# Altium PCB BBiQ_PCB.PcbDoc (part 1 of 2)
Units mil, origin at the board's own origin, x right, y up, seen from the top; angles counter-clockwise.
Board outline 2950 x 4745 mil, 2 copper layers (Top Layer, Bottom Layer); 173 components, 113 nets, 521 pads, 256 vias.
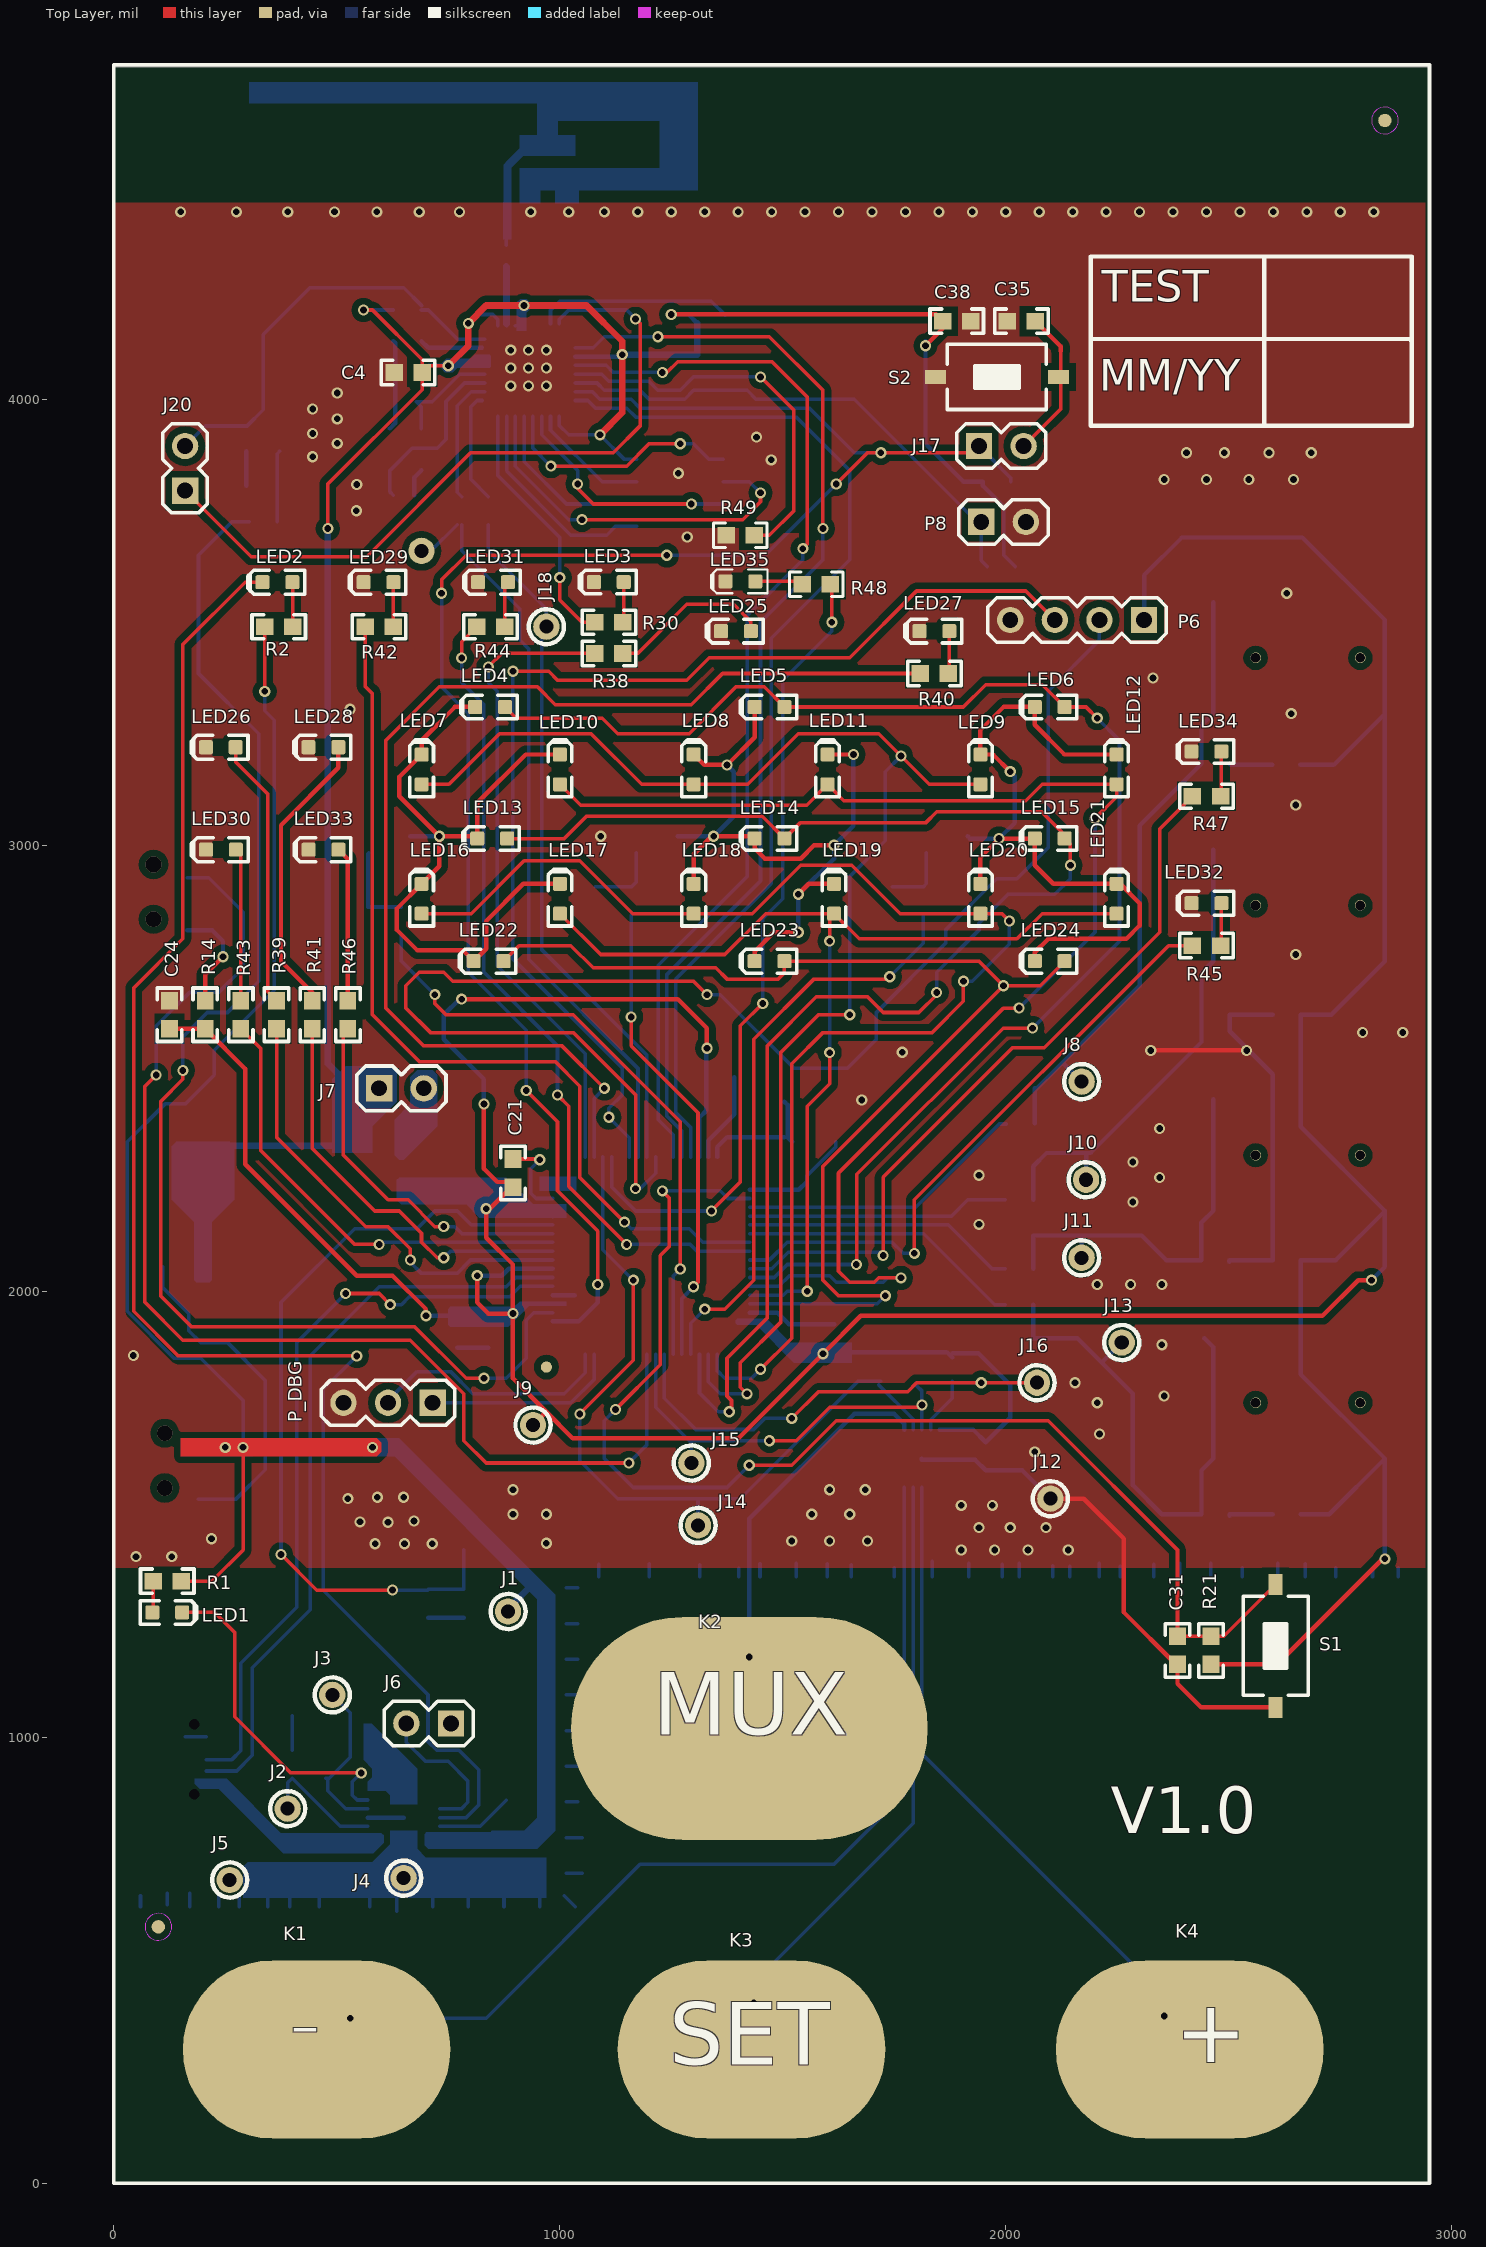
[diagram p0: Top Layer view]
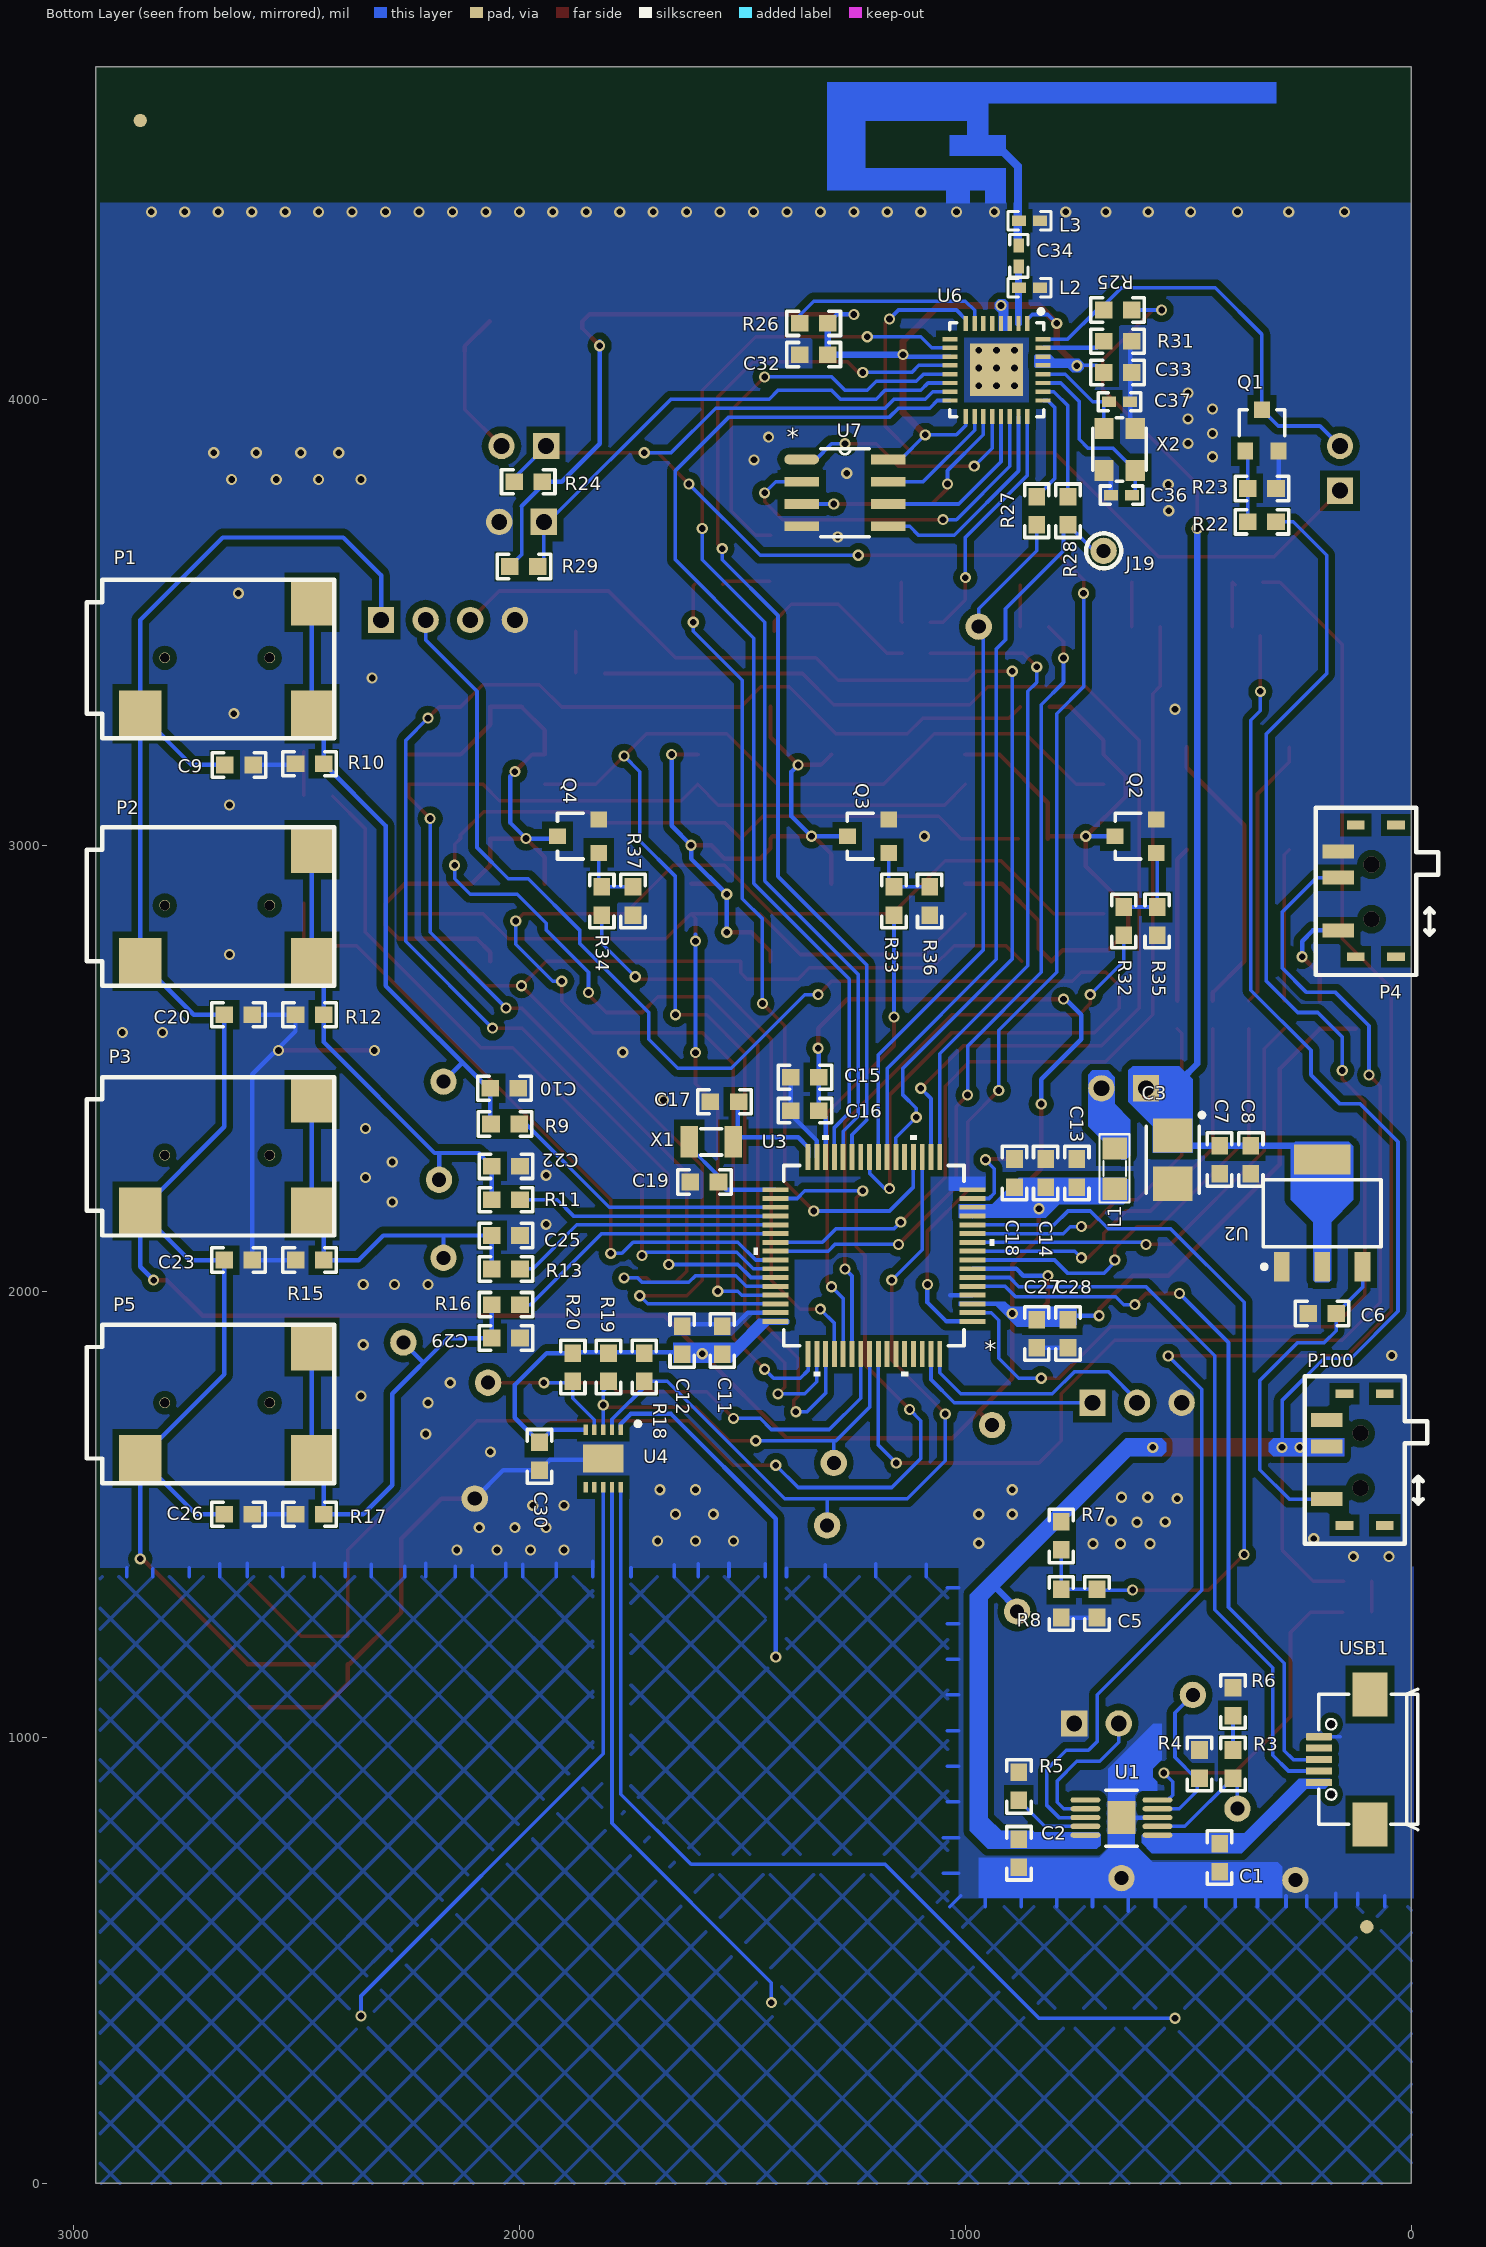
[diagram p1: Bottom Layer view, seen from below]
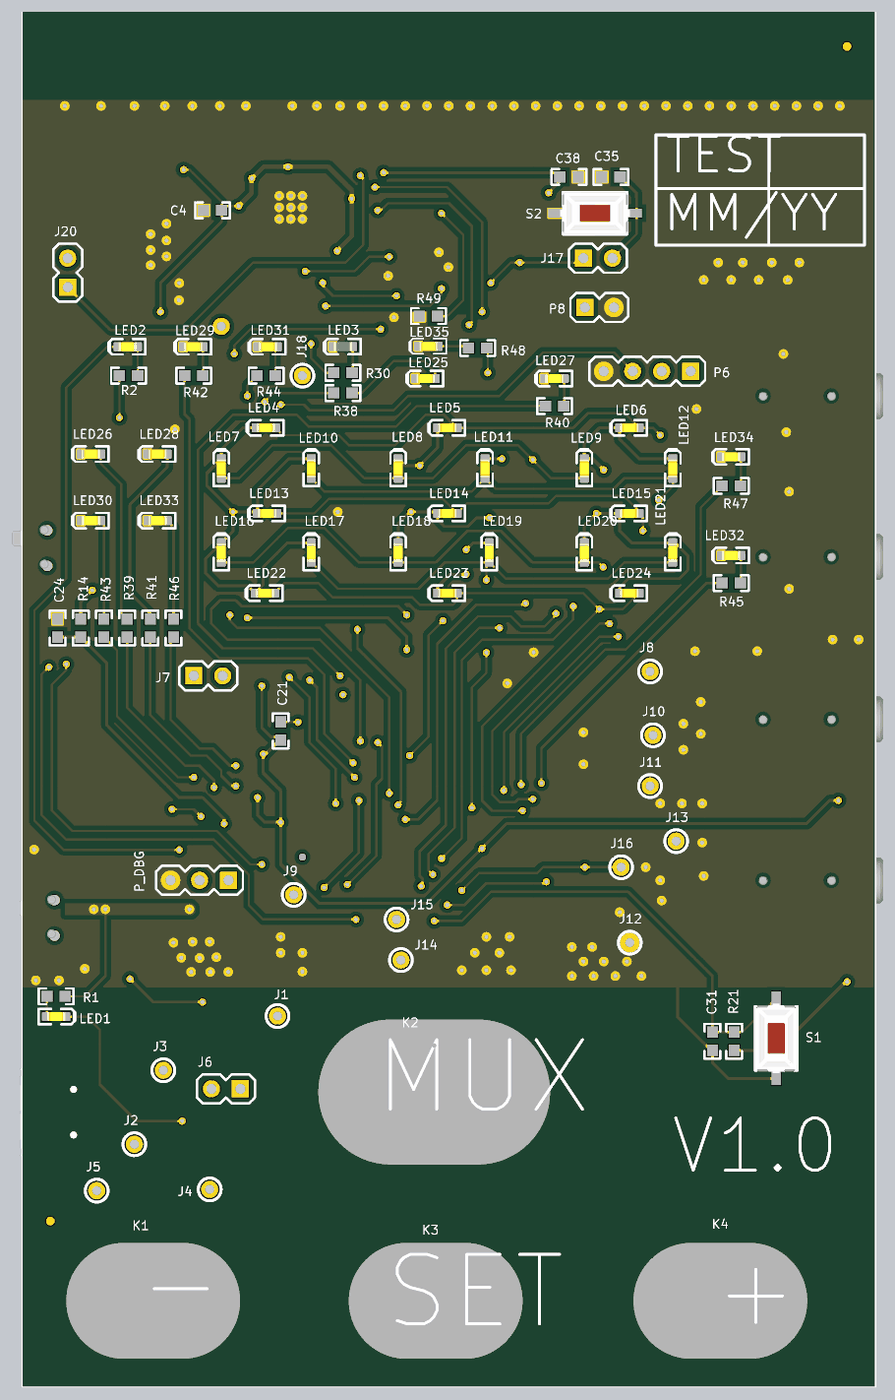
[diagram p3: 3D render of the assembled board from above, using the file's embedded part models]

## Layer stack, top to bottom
Top Solder: solder mask 0.4, Solder Resist, Dk 3.5
Top Layer: signal copper 1.4
Dielectric 1: dielectric 12.6, FR-4, Dk 4.8
Bottom Layer: signal copper 1.4
Bottom Solder: solder mask 0.4, Solder Resist, Dk 3.5

## Board outline
0,0 2950,0 2950,170 2950,4745 2640,4745 0,4745 0,4485 0,0

## Design rules (kind name [scope] priority, off if disabled: settings)
Clearance [All] p1: gap=15
DiffPairsRouting [All] p1: maxlimit=10 minlimit=10 mostfreqgap=10 toplayer_minwidth=8 toplayer_maxwidth=15 toplayer_prefwidth=10 bottomlayer_minwidth=8 bottomlayer_maxwidth=15 bottomlayer_prefwidth=10 maxuncoupledlength=500
PolygonConnect PolygonConnect_Via [InNet('GND')] p1: connectstyle=Direct reliefconductorwidth=10 reliefentries=4 polygonreliefangle="90 Angle" airgapwidth=10
PolygonConnect [All] p2: connectstyle=Relief reliefconductorwidth=10 reliefentries=4 polygonreliefangle="90 Angle" airgapwidth=10
RoutingVias [All] p1: holewidth=15 width=15 viastyle="Through Hole" minholewidth=15 minwidth=25 maxholewidth=20 maxwidth=50
SolderMaskExpansion [All] p1: expansion=4
Width [All] p1: maxlimit=20 minlimit=8 preferedwidth=8 minimp=50.000000 maximp=50.000000 favimp=50.000000
Width Width_3v3 [(InNet('V_ESP') AND InNet('V_KL27'))] p2: maxlimit=15 minlimit=15 preferedwidth=15 minimp=50.000000 maximp=50.000000 favimp=50.000000
29 further rules are at their usual default settings.

## Classes and differential pairs
differential pair USB_D: +USB_D_P -USB_D_N

## Components (designator, comment, footprint, x,y, rotation, side; value= is the part's Value field where it differs from the comment)
C1 "1uF" 0603 430,730 r270 bottom
C2 "2.2uF" 0603 880,740 r270 bottom
C3 "293D107X96R3B2TE3" 3528-21 535,2295 r270 bottom
C4 "103" 0603 660,4060 r180 top
C5 "0603YC104JAT2A" 0603 705,1300 r270 bottom
C6 "103" 0603 200,1950 r0 bottom
C7 "103" 0603 430,2295 r270 bottom
C8 "103" 0603 360,2295 r270 bottom
C9 "0603YC104JAT2A" 0603 2628.5,3180 r180 bottom
C10 "0603YC104JAT2A" 0603 2033.5,2455 r180 bottom
C11 "0603YC104JAT2A" 0603 1545,1890 r90 bottom
C12 "0603YC104JAT2A" 0603 1635,1890 r90 bottom
C13 "0603YC104JAT2A" 0603 750,2265 r90 bottom
C14 "0603YC104JAT2A" 0603 820,2265 r90 bottom
C15 "0603YC104JAT2A" 0603 1360,2480 r0 bottom
C16 "0603YC104JAT2A" 0603 1360,2405 r0 bottom
C17 "0603YC104JAT2A" 0603 1540,2425 r0 bottom
C18 "0603YC104JAT2A" 0603 890,2265 r90 bottom
C19 "0603YC104JAT2A" 0603 1585,2245 r0 bottom
C20 "0603YC104JAT2A" 0603 2630,2620 r180 bottom
C21 "0603YC104JAT2A" 0603 895,2265 r90 top
C22 "0603YC104JAT2A" 0603 2030,2280 r180 bottom
C23 "0603YC104JAT2A" 0603 2630,2070 r180 bottom
C24 "0603YC104JAT2A" 0603 125,2620 r90 top
C25 "0603YC104JAT2A" 0603 2030,2125 r180 bottom
C26 "0603YC104JAT2A" 0603 2630,1500 r180 bottom
C27 "0603YC104JAT2A" 0603 840,1905 r270 bottom
C28 "0603YC104JAT2A" 0603 770,1905 r270 bottom
C29 "0603YC104JAT2A" 0603 2030,1895 r180 bottom
C30 "0603YC104JAT2A" 0603 1955,1630 r270 bottom
C31 "0.1uF" 0603 2385,1195 r270 top
C32 "10uF" 0603 1340,4100 r0 bottom
C33 "0.1uF" 0603 658.5,4060 r180 bottom
C34 "5.6p" 0402 880,4321.38 r90 bottom
C35 "0.1uF" 0603 2035,4175 r180 top
C36 "10pF" 0402 650,3785 r0 bottom
C37 "10pF" 0402 654.37,3994.37 r180 bottom
C38 "0.1uF" 0603 1890,4175 r0 top
J1 "TP" TP 884,1282 r270 top
J2 "TP" TP 390,840 r180 top
J3 "TP" TP 490,1095 r180 top
J4 "TP" TP 650,684.21 r270 top
J5 "TP" TP 260,680 r180 top
J6 "I_SET2" HDR1X2 756,1031 r180 top
J7 "Power Selection" HDR1X2 595,2455 r0 top
J8 "TP" TP 2170,2470 r0 top
J9 "TP" TP 940,1700 r0 top
J10 "TP" TP 2180,2250 r0 top
J11 "TP" TP 2170,2075 r0 top
J12 "TP" TP 2100,1535 r0 top
J13 "TP" TP 2260,1885 r0 top
J14 "TP" TP 1310,1475 r0 top
J15 "TP" TP 1295,1615 r0 top
J16 "TP" TP 2070,1795 r0 top
J17 "Manual Boot" HDR1X2 1940,3895 r0 top
J18 "TP" TP 970,3490 r0 top
J19 "TP" TP 690,3660 r180 bottom
J20 "DeepSleep" HDR1X2 160,3795 r90 top
K1 "Single_Key" PAD_FINGETIP#1 455,300 r0 top
K2 "Single_Key" PAD_FINGETIP#2 1425,1020 r0 top
K3 "Single_Key" PAD_FINGETIP#1 1430,300 r0 top
K4 "Single_Key" PAD_FINGETIP#1 2412.54,300 r0 top
L1 "100nH 330Ohm 100MHz" 0805 665,2275 r270 bottom
L2 "CRCW08051K00JNEA" 0402 856.38,4250 r0 bottom
L3 "CRCW08051K00JNEA" 0402 856.38,4400 r0 bottom
LED1 "LED" LED-0603-YELLOW 120,1280 r0 top
LED2 "LED" LED-0603-YELLOW 366.85,3589.69 r180 top
LED3 "Green" LED0603 1110,3590 r180 top
LED4 "LED" LED-0603-YELLOW 843.78,3310 r180 top
LED5 "LED" LED-0603-YELLOW 1470.32,3310 r180 top
LED6 "LED" LED-0603-YELLOW 2098.46,3310 r180 top
LED7 "LED" LED-0603-YELLOW 690.32,3170 r90 top
LED8 "LED" LED-0603-YELLOW 1300.32,3170 r90 top
LED9 "LED" LED-0603-YELLOW 1943.15,3170 r90 top
LED10 "LED" LED-0603-YELLOW 1000.32,3170 r90 top
LED11 "LED" LED-0603-YELLOW 1600.32,3170 r90 top
LED12 "LED" LED-0603-YELLOW 2248.46,3170 r90 top
LED13 "LED" LED-0603-YELLOW 848.46,3015 r180 top
LED14 "LED" LED-0603-YELLOW 1470.32,3015 r180 top
LED15 "LED" LED-0603-YELLOW 2098.46,3015 r180 top
LED16 "LED" LED-0603-YELLOW 690.32,2880 r90 top
LED17 "LED" LED-0603-YELLOW 1000.32,2880 r90 top
LED18 "LED" LED-0603-YELLOW 1300.32,2880 r90 top
LED19 "LED" LED-0603-YELLOW 1615,2880 r90 top
LED20 "LED" LED-0603-YELLOW 1943.15,2880 r90 top
LED21 "LED" LED-0603-YELLOW 2248.46,2880 r90 top
LED22 "LED" LED-0603-YELLOW 840.32,2740 r180 top
LED23 "LED" LED-0603-YELLOW 1470.32,2740 r180 top
LED24 "LED" LED-0603-YELLOW 2098.46,2740 r180 top
LED25 "LED" LED-0603-YELLOW 1395,3480 r180 top
LED26 "LED" LED-0603-YELLOW 240,3219.69 r180 top
LED27 "LED" LED-0603-YELLOW 1840,3480 r180 top
LED28 "LED" LED-0603-YELLOW 470,3219.69 r180 top
LED29 "LED" LED-0603-YELLOW 593.78,3589.69 r180 top
LED30 "LED" LED-0603-YELLOW 240.32,2990 r180 top
LED31 "LED" LED-0603-YELLOW 850.32,3589.69 r180 top
LED32 "LED" LED-0603-YELLOW 2450,2870 r180 top
LED33 "LED" LED-0603-YELLOW 470.32,2990 r180 top
LED34 "LED" LED-0603-YELLOW 2450,3210 r180 top
LED35 "LED" LED-0603-YELLOW 1405,3591.5 r180 top
P1 "Header 3" JACK_MONO 2795,3420 r180 bottom
P2 "Header 3" JACK_MONO 2795,2865 r180 bottom
P3 "Header 3" JACK_MONO 2795,2305 r180 bottom
P4 "Header 3" SW_SLIDE 164.37,2809.06 r90 bottom
P5 "Header 3" JACK_MONO 2795,1750 r180 bottom
P6 "Header 4" HDR1X4 2310,3505 r180 top
P8 "Header 2X1" HDR1X2 1945,3725 r0 top
P100 "Header 3" SW_SLIDE 189.37,1534.06 r90 bottom
P_DBG "Header 3" HDR1X3 715,1750 r180 top
Q1 "MMBT2222A" SOT23A 335,3930 r180 bottom
Q2 "MMBT2222A" SOT23A 618.15,3020.31 r90 bottom
Q3 "MMBT2222A" SOT23A 1218.15,3020.31 r90 bottom
Q4 "MMBT2222A" SOT23A 1868.15,3020.31 r90 bottom
R1 "1.5k" 0603 120,1350 r0 top
R2 "1.5k" 0603 370,3490 r180 top
R3 "220" 0603 400,940 r270 bottom
R4 "10k" 0603 475,940 r270 bottom
R5 "10k" 0603 880,890 r270 bottom
R6 "330" 0603 400,1080 r270 bottom
R7 "10k" 0603 785,1451.5 r90 bottom
R8 "10k" 0603 785,1300 r90 bottom
R9 "CRCW06031K00FKEA" 0603 2032.01,2375 r180 bottom
R10 "CRCW06031K00FKEA" 0603 2470.33,3182.73 r180 bottom
R11 "CRCW06031K00FKEA" 0603 2030,2205 r180 bottom
R12 "CRCW06031K00FKEA" 0603 2470.33,2620 r180 bottom
R13 "CRCW06031K00FKEA" 0603 2030,2050 r180 bottom
R14 "CRCW08051K00JNEA" 0603 205,2620 r90 top
R15 "CRCW06031K00FKEA" 0603 2470,2070 r180 bottom
R16 "CRCW06031K00FKEA" 0603 2030,1970 r180 bottom
R17 "CRCW06031K00FKEA" 0603 2470.33,1500 r180 bottom
R18 "CRCW08051K00JNEA" 0603 1720,1830 r270 bottom
R19 "CRCW08051K00JNEA" 0603 1800,1830 r270 bottom
R20 "CRCW08051K00JNEA" 0603 1880,1830 r270 bottom
R21 "CRCW08051K00JNEA" 0603 2460,1195 r90 top
R22 "CRCW08051K00JNEA" 0603 335,3725 r0 bottom
R23 "CRCW08051K00JNEA" 0603 335,3800 r0 bottom
R24 "CRCW08051K00JNEA" 0603 1980,3815 r180 bottom
R25 "CRCW08051K00JNEA" 0603 658.5,4200 r180 bottom
R26 "CRCW08051K00JNEA" 0603 1340,4170 r180 bottom
R27 "CRCW08051K00JNEA" 0603 840,3750 r90 bottom
R28 "CRCW08051K00JNEA" 0603 770,3750 r90 bottom
R29 "CRCW08051K00JNEA" 0603 1990,3625 r0 bottom
R30 "CRCW08051K00JNEA" 0603 1110,3500 r180 top
R31 "CRCW08051K00JNEA" 0603 658.5,4130 r0 bottom
R32 "CRCW06031K00FKEA" 0603 645,2830 r90 bottom
R33 "CRCW06031K00FKEA" 0603 1160,2875 r90 bottom
R34 "CRCW06031K00FKEA" 0603 1815,2875 r90 bottom
R35 "CRCW06031K00FKEA" 0603 570,2830 r90 bottom
R36 "CRCW06031K00FKEA" 0603 1080,2875 r90 bottom
R37 "CRCW06031K00FKEA" 0603 1745,2875 r90 bottom
R38 "CRCW06031K00FKEA" 0603 1110,3430 r180 top
R39 "CRCW06031K00FKEA" 0603 365,2620 r270 top
R40 "CRCW06031K00FKEA" 0603 1840,3385 r180 top
R41 "CRCW06031K00FKEA" 0603 445,2620 r270 top
R42 "CRCW06031K00FKEA" 0603 595,3490 r180 top
R43 "CRCW06031K00FKEA" 0603 285,2620 r270 top
R44 "CRCW06031K00FKEA" 0603 845,3490 r180 top
R45 "CRCW06031K00FKEA" 0603 2450,2775 r180 top
R46 "CRCW06031K00FKEA" 0603 525,2620 r270 top
R47 "CRCW06031K00FKEA" 0603 2450,3110 r180 top
R48 "CRCW06031K00FKEA" 0603 1575,3585 r0 top
R49 "CRCW06031K00FKEA" 0603 1405,3695 r180 top
S1 "SW-SMD" SW-SMD 2605,1205 r270 top
S2 "SW-SMD" SW-SMD 1980,4050 r180 top
U1 "BQ24090DGQR" DGQ0010D_NV_N 650,820 r0 bottom
U2 "NCP1117" SOT-223B_L 200,2175 r90 bottom
U3 "MKL27Z64VLH4" 98ASS23234W 1205,2080 r0 bottom
U4 "CAP1106" TDFN33-10PIN 1812.01,1625 r270 bottom
U6 "ESP8266EX" QFN32_ESP8266 930,4065.94 r270 bottom
U7 "W25Q80DV" SOIC8_208MIL 1270,3790 r180 bottom
USB1 "USB_M" USB_MICRO_SMD 150,950 r90 bottom
X1 "32.768KHZ" XTAL_3215 1570,2335 r180 bottom
X2 "26MHz" BT-XTAL_3225 654.31,3887.36 r270 bottom

## Footprints (in the part's own frame and the unit in brackets; to place one, negate y for a bottom-side part, rotate by r counter-clockwise, add the part's x,y. Pads: shape width x height; smd on the part's side, far side on the other; paste and mask are expansions set on the pad)
98ASS23234W [mil]
  rect 58x11 smd: 1(-221,147.64) 2(-221,127.95) 3(-221,108.27) 4(-221,88.58) 5(-221,68.9) 6(-221,49.21) 7(-221,29.53) 8(-221,9.84) 9(-221,-9.84) 10(-221,-29.53) 11(-221,-49.21) 12(-221,-68.9) 13(-221,-88.58) 14(-221,-108.27) 15(-221,-127.95) 16(-221,-147.64) 33(221,-147.64) 34(221,-127.95) 35(221,-108.27) 36(221,-88.58) 37(221,-68.9) 38(221,-49.21) 39(221,-29.53) 40(221,-9.84) 41(221,9.84) 42(221,29.53) 43(221,49.21) 44(221,68.9) 45(221,88.58) 46(221,108.27) 47(221,127.95) 48(221,147.64)
  rect 11x58 smd: 17(-147.64,-221) 18(-127.95,-221) 19(-108.27,-221) 20(-88.58,-221) 21(-68.9,-221) 22(-49.21,-221) 23(-29.53,-221) 24(-9.84,-221) 25(9.84,-221) 26(29.53,-221) 27(49.21,-221) 28(68.9,-221) 29(88.58,-221) 30(108.27,-221) 31(127.95,-221) 32(147.64,-221) 49(147.64,221) 50(127.95,221) 51(108.27,221) 52(88.58,221) 53(68.9,221) 54(49.21,221) 55(29.53,221) 56(9.84,221) 57(-9.84,221) 58(-29.53,221) 59(-49.21,221) 60(-68.9,221) 61(-88.58,221) 62(-108.27,221) 63(-127.95,221) 64(-147.64,221)
  silkscreen extent -270,-270 270,270
0402 [mm] "0402 from SM-752 data"
  rect 0.8x0.6 smd: 1(-0.6,0) 2(0.6,0)
  silkscreen extent -1.22,-0.52 1.22,0.52, body extent -0.55,-0.3 0.55,0.3, height 0.6
0603 [mm] "0603 from SM-752 data"
  rect 1x0.95 smd: 1(-0.8,0) 2(0.8,0)
  silkscreen extent -1.52,-0.69 1.52,0.69, body extent -0.87,-0.47 0.87,0.47, height 0.85
0805 [mil] "Compoment SMD 80x50mil"
  rect 50x55 smd: 1(-45,0) 2(45,0)
  silkscreen extent -77,-34 76,33, body extent -40,-27 40,23, height 24
3528-21 [mm] "Medium Density IPC, based on SM-782 section 8.4"
  rect 1.95x2.25 smd: 1(-1.375,0) 2(1.375,0)
  silkscreen extent -2.66,-1.5 1.9,1.79, body extent -1.85,-1.5 1.85,1.5, height 2.1
BT-XTAL_3225 [mm]
  rect 1.2x1.1 smd: 1(-1.194,-0.89) 2(1.194,-0.89) 3(1.194,0.891) 4(-1.194,0.891)
  silkscreen extent -1.8,-1.52 1.8,1.52, body extent -1.6,-1.25 1.61,1.25, height 0.81
DGQ0010D_NV_N [mm]
  oval 1.7x0.3 smd paste+0 mask+0.051: 1(-2.05,1) 2(-2.05,0.5) 3(-2.05,0) 4(-2.05,-0.5) 5(-2.05,-1) 6(2.05,-1) 7(2.05,-0.5) 8(2.05,0) 9(2.05,0.5) 10(2.05,1)
  rect 1.57x1.88 smd paste+0 mask+0.051: 11(0,0)
  silkscreen extent -0.9,-1.55 0.9,1.63
HDR1X2 [mm] "Connector; Header; 2 Position"
  rect 1.5x1.5 hole 0.9: 1(0,0)
  round 1.5 hole 0.9: 2(2.54,0)
  silkscreen extent -1.27,-1.27 3.81,1.27, body extent -1.27,-1.27 3.81,1.27, height 7
HDR1X3 [mm] "Connector; Header; 3 Position"
  rect 1.5x1.5 hole 0.9: 1(0,0)
  round 1.5 hole 0.9: 2(2.54,0) 3(5.08,0)
  silkscreen extent -1.27,-1.27 6.35,1.27, body extent -1.27,-1.27 6.35,1.27, height 7
HDR1X4 [mm] "Connector; Header; 4 Position"
  rect 1.5x1.5 hole 0.9: 1(0,0)
  round 1.5 hole 0.9: 2(2.54,0) 3(5.08,0) 4(7.62,0)
  silkscreen extent -1.27,-1.27 8.89,1.27, body extent -1.27,-1.27 8.89,1.27, height 7
JACK_MONO [mm] "Female phone modular jack PJ-203A-SMD"
  rect 2.4x2.65 smd: 1(-1.397,-3.175) 2(8.382,-3.175) 3(8.382,3.175)
  silkscreen extent -4.45,-4.57 9.65,4.45, body extent -4.53,-4.02 8.97,3.98, height 4.51
LED0603 [mm] "LED 0603 package"
  round 0.254 on Mech15: 0(0,0)
  rrect25% 0.8x0.8 smd: 1(-0.85,0) 2(0.85,0)
  Top Layer pour cut-out: -0.5,0.5 0.5,0.5 0.5,-0.5 -0.5,-0.5
  silkscreen extent -1.55,-0.67 1.68,0.67, body extent -0.8,-0.4 0.8,0.4, height 0.75
LED-0603-YELLOW [mm]
  round 0.254 on Mech15: 0(0,0)
  rrect25% 0.8x0.8 smd: 1(-0.85,0) 2(0.85,0)
  Top Layer pour cut-out: -0.5,0.5 0.5,0.5 0.5,-0.5 -0.5,-0.5
  silkscreen extent -1.55,-0.67 1.68,0.67, body extent -0.8,-0.4 0.8,0.4, height 0.75
PAD_FINGETIP#1 [mil]
  oval 600x400 smd paste+0: 1(0,0)
PAD_FINGETIP#2 [mil]
  oval 800x500 smd paste+0: 1(0,0)
QFN32_ESP8266 [mm] "QFN, 32-Leads, Body 5.00x5.00mm, Pitch 0.50mm, Thermal Pad 3.70x3.70mm, IPC Medium Density"
  rect 0.85x0.25 smd: 1(-2.625,1.75) 2(-2.625,1.25) 3(-2.625,0.75) 4(-2.625,0.25) 5(-2.625,-0.25) 6(-2.625,-0.75) 7(-2.625,-1.25) 8(-2.625,-1.75) 17(2.65,-1.75) 18(2.65,-1.25) 19(2.65,-0.75) 20(2.65,-0.25) 21(2.65,0.25) 22(2.65,0.75) 23(2.65,1.25) 24(2.65,1.75)
  rect 0.25x0.85 smd: 9(-1.75,-2.65) 10(-1.25,-2.65) 11(-0.75,-2.65) 12(-0.25,-2.65) 13(0.25,-2.65) 14(0.75,-2.65) 15(1.25,-2.65) 16(1.75,-2.65) 25(1.75,2.65) 26(1.25,2.65) 27(0.75,2.65) 28(0.25,2.65) 29(-0.25,2.65) 30(-0.75,2.65) 31(-1.25,2.65) 32(-1.75,2.65)
  rect 0x0 smd: 33(0,0) 36(0,1.5) 37(0,0) 40(0,-1.5)
  rect 3x3 smd: 33(0,0)
  rect 0x3 smd: 34(-1.5,0) 38(1.5,0)
  rect 3x0 smd: 35(0,0) 39(0,0)
  silkscreen extent -3.45,-2.67 2.67,2.68, body extent -2.53,-2.52 2.52,2.53, height 0.85
SOIC8_208MIL [mil] "SOIC 8 208mil width"
  oval 78x22 smd: 1(-97,75)
  rect 78x22 smd: 2(-97,25) 3(-97,-25) 4(-97,-75) 5(97,-75) 6(97,-25) 7(97,25) 8(97,75)
  silkscreen extent -54,-98 54,98
SOT23A [mm] "SOT-23; 3 Leads; Body 3.0 x 2.5 mm, inc. leads (LxW max)"
  rect 0.9x0.95 smd: 1(-0.95,-1.175) 2(0.95,-1.175) 3(0,1.175)
  silkscreen extent -1.3,-0.3 1.3,1.18
SOT-223B_L [mm] "SOT223, 4-Leads, Body 6.5x3.5mm, Pitch 2.3mm, Lead Span 7mm, IPC High Density"
  rect 1.7x0.9 smd: 1(-3.05,2.3) 2(-3.05,0) 3(-3.05,-2.3)
  rect 1.7x3.2 smd: 4(3.05,0)
  silkscreen extent -3.17,-3.35 1.9,3.43, body extent -1.85,-3.35 1.85,3.35, height 1.8
SW-SMD [mm] "Switch SMD type"
  rect 1.2x0.8 smd: 1(-3.5,0) 2(3.5,0)
  silkscreen extent -2.82,-1.85 2.82,1.85, body extent -3.05,-1.85 3.05,1.85, height 2.5
SW_SLIDE [mm] "SMD Slide switch SPDT"
  rect 0.8x1.8 smd: 1(0,0) 2(3,0) 3(4.5,0)
  rect 0.5x1 smd: 4(-1.5,-1) 5(-1.5,-3.3) 6(6,-1) 7(6,-3.3)
  silkscreen extent -2.54,-5.71 6.98,1.27, body extent -1.56,-4.96 6.14,0.04, height 1.31
TDFN33-10PIN [mm] "PQFN127P600-8N"
  rect 0.6x0.25 smd: 1(-1.627,1) 2(-1.627,0.5) 3(-1.627,0) 4(-1.627,-0.5) 5(-1.627,-1) 6(1.627,-1) 7(1.627,-0.5) 8(1.627,0) 9(1.627,0.5) 10(1.627,1)
  rect 1.6x2.3 smd: 11(0,0)
  silkscreen extent -2.1,1.85 -1.85,2.1, body extent -1.53,-1.53 1.53,1.53, height 0.8
TP [mm] "testpoint true"
  round 1.5 hole 0.8: 0(0,0)
  silkscreen extent -1,-1 1,1, body extent -0.41,-0.41 0.39,0.39, height 7
USB_MICRO_SMD [mm]
  round 0 hole 0.6: 0(-1.981,0.764) 1(2.007,0.764)
  rrect20% 0.4x1.5 smd: 1(-1.3,1.45) 2(-0.65,1.45) 3(0,1.45) 4(0.65,1.45) 5(1.3,1.45)
  rect 2.5x2 smd: SH(-3.7,-1.45) SH(3.7,-1.45)
  silkscreen extent -3.99,-4.17 4.01,1.46, body extent -3.99,-3.93 3.99,1.5, height 2.71
XTAL_3215 [mm]
  rect 1x1.8 smd: 1(-1.25,0) 2(1.25,0)
  silkscreen extent -0.6,-0.75 0.6,0.75, body extent -1.6,-0.75 1.6,0.75, height 0.81

## Part data
C1 C2 C4 C6 C7 C8 C31 C32 C33 C34 C35 C36 C37 C38: library part "Cap 0805", "Ceramic"
C3: library part C_293D107X96R3B2TE3, "CAP, TANT, 100uF, 6.3V, +/-10%, 1.7 ohm, 3528-21 SMD"
C5 C9 C10 C11 C12 C13 C14 C15 C16 C17 C18 C19 C20 C21 C22 C23 C24 C25 C26 C27 C28 C29 C30: library part Cap_0603, "CAP, CERM, 0.1uF, 16V, +/-5%, X7R, 0603"
J1 J2 J3 J4 J5 J8 J9 J10 J11 J12 J13 J14 J15 J16 J18 J19: "Test point (true)"
J6 J7 J17 J20: library part 923345-02-C, "Jumper Wire, 200mil spacing, Red, pkg of 200"
K1 K2 K3 K4: "Single Key Touch"
L1: library part L1, "Inductor"
L2 L3 R1 R2 R3 R4 R5 R6 R7 R8 R14 R18 R19 R20 R21 R22 R23 R24 R25 R26 R27 R28 R29 R30 R31: library part R0805_025W, "RES 5%, 0.125W, 0805"
LED1 LED2 LED4 LED5 LED6 LED7 LED8 LED9 LED10 LED11 LED12 LED13 LED14 LED15 LED16 LED17 LED18 LED19 LED20 LED21 LED22 LED23 LED24 LED25 LED26 LED27 LED28 LED29 LED30 LED31 LED32 LED33 LED34 LED35: "Typical INFRARED GaAs LED"
LED3: library part LEDSMD, "LED SMD"
P1 P2 P3 P4 P5 P100 P_DBG: "Header, 3-Pin"
P6: "Header, 4-Pin"
P8: "Header, 2-Pin"
Q1 Q2 Q3 Q4: "NPN switching transistor  40V 600mA SOT23"
R9 R10 R11 R12 R13 R15 R16 R17 R32 R33 R34 R35 R36 R37 R38 R39 R40 R41 R42 R43 R44 R45 R46 R47 R48 R49: library part R0603, "RES, 1.00k ohm, 1%, 0.1W, 0603"
S1 S2: "Switch"
U1: "Single Cell Li-Ion and Li-Pol Battery Charger"
U2: "1000mA Low-Dropout Positive Fixed and Adjustable Voltage Regulators"
U3: "ARM cortex M0+ 64Kb Flash LQFP-64"
U4: "6 Channel Capacitive Touch Sensor"
U6: "ESP8266EX Espressif Systems"
U7: "IC FLASH 8MBIT 104MHZ 8SOIC"
X1: "XTAL SMD 3215, 32.768kHz, 9pF, ±20ppm"
X2: "XTAL SMD 2520, 16MHz, 8pF, ±40ppm"

## Free pads (board coordinates)
  round 25 smd: 0(970,1830)
  round 30 all layers, no hole: ""(100,575) ""(2850,4625)

## Via types
v1: diameter 25, hole 15, Top Layer to Bottom Layer, 244 vias
v2: diameter 23.62, hole 21.65, Top Layer to Bottom Layer, 8 vias
v3: diameter 35.43, hole 35.43, Top Layer to Bottom Layer, 4 vias

## Nets (pads, with @x,y where several pads share a name; then routed paths per layer and width w, separated by ;. In a path a pad name is that pad's centre, name@x,y a point inside that pad or via, vN(x,y) a via of type N, cw(c..) or ccw(c..) an arc to the next point about the centre after c; other vN are vias at no path point)
ANT: C34.1 L2.2 U6.2 | length 133.7
  Bottom Layer w8: U6.2@880.79,4164.37 U6.2@880.79,4169.29
  Bottom Layer w15: C34.1@880,4297.76 880.79,4296.97 U6.2@880.79,4169.29
BAT_MEASURE: C5.1 R7.1 R8.2 U3.12 | length 1804.1
  Top Layer w8: v1(375,1410) 455,1330 v1(625,1330)
  Bottom Layer w8: v1(375,1410) 375,1975 540,2140 680,2140 720,2180 770,2180 801.1,2148.9 U3.12@984,2148.9 ; v1(625,1330) 703.5,1330 C5.1@705,1331.5 R8.2@785,1331.5 R7.1@785,1420
C_F_SWITCH: P4.2 U3.57 | length 2718.1
  Top Layer w8: v1(95,2485) 70,2460 70,1975 155,1890 665,1890 785,1770 785,1665 835,1615 v1(1155,1615)
  Bottom Layer w8: v1(95,2485) 95,2595 170,2670 235,2670 290,2725 290,2850 212.83,2927.17 P4.2@164.37,2927.17 ; v1(1155,1615) 1195.16,1655.16 U3.57@1195.16,1859
CAP1106_ALERT: J14.0 R18.2 U3.19 U4.2 | length 1771.3
  Top Layer w8: v1(1045,1725) 1165,1845 v1(1165,2025)
  Bottom Layer w8: v1(1045,1725) 1045,1620 1130,1535 1310,1535 ; U3.19@1096.73,2301 1096.73,2093.27 v1(1165,2025) ; J14.0@1310,1475 1310,1535 ; R18.2@1715,1790 1792.32,1712.68 U4.2@1792.32,1689.06 ; R18.2@1720,1798.5 1668.5,1798.5 1405,1535 1310,1535
CAP1106_SCL: J16.0 R20.2 U3.55 U4.4 | length 1182.6
  Top Layer w8: v1(1520,1715) 1580,1775 1780,1775 1800,1795 v1(1945,1795) J16.0@2070,1795
  Bottom Layer w8: U3.55@1234.53,1859 1234.53,1760.47 1305,1690 1435,1690 1460,1715 v1(1520,1715) ; U4.4@1831.69,1689.06 1831.69,1711.69 1880,1760 R20.2@1880,1788.5 ; R20.2@1880,1798.5 1883.5,1795 v1@1935,1795
CAP1106_SDA: J15.0 R19.2 U3.56 U4.3 | length 934.7
  Top Layer w8: v1(1470,1665) 1530,1665 1605,1740 1807.01,1740 v1(1812.01,1745)
  Bottom Layer w8: U3.56@1214.84,1859 1214.84,1740.16 1290,1665 1295,1665 ; J15.0@1295,1615 1295,1665 ; v1(1470,1665) 1295,1665 ; R19.2@1800,1788.5 1812.01,1776.5 v1(1812.01,1745) U4.3@1812.01,1689.06
CHG_N: LED2.2 U1.8 | length 3628.6
  Top Layer w8: LED2.2@333.39,3589.69 294.68,3589.69 155,3450 155,2790 45,2680 45,1955 145,1855 v1(545,1855)
  Bottom Layer w8: v1(545,1855) 470,1780 470,1330 704.53,1095.47 704.53,990.47 724,971 774,971 818,927 818,848 790,820 U1.8@730.71,820
CLK: U6.21 U7.6 | length 393.9
  Bottom Layer w8: U6.21@920.16,3961.61 920.16,3859.84 1015,3765 U7.6@1173,3765
CS: U6.20 U7.1 | length 550.5
  Top Layer w8: v1(980,3850) 1150,3850 1200,3900 v1(1270,3900)
  Bottom Layer w8: U6.20@939.84,3961.61 939.84,3890.16 v1(980,3850) ; v1(1270,3900) 1300,3900 1335,3865 U7.1@1367,3865
DEBUG_RX: P_DBG.1 U3.63 | length 440.6
  Bottom Layer w8: P_DBG.1@715,1750 1025,1750 1077.05,1802.05 U3.63@1077.05,1859
DEBUG_TX: P_DBG.2 U3.64 | length 556.3
  Bottom Layer w8: P_DBG.2@615,1750 615,1755 680,1820 755,1820 805,1770 1010,1770 1057.36,1817.36 U3.64@1057.36,1859
DI: U6.23 U7.5 | length 482.6
  Bottom Layer w8: U6.23@880.79,3961.61 880.79,3839.21 1025,3695 1105,3695 1125,3715 U7.5@1173,3715
DO: U6.22 U7.2 | length 841
  Top Layer w8: v1(1050,3730) 1410,3730 1450,3770 v1(1450,3790)
  Bottom Layer w8: U6.22@900.47,3961.61 900.47,3849.53 1020,3730 v1(1050,3730) ; U7.2@1367,3815 1425,3815 v1(1450,3790)
GND: C1.2 C2.2 C3.2 C4.2 C5.2 C6.2 C7.2 C8.2 C9.2 C10.2 C11.2 C12.2 C13.2 C14.2 C15.2 C16.2 C17.2 C18.2 C19.2 C20.2 C22.2 C23.2 C24.2 C25.2 C26.2 C27.2 C28.2 C29.2 C30.2 C31.2 C32.2 C33.2 C35.2 C36.2 C37.2 C38.2 J4.0 J5.0 J6.1 J12.0 L2.1 L3.1 LED3.2 LED25.2 LED26.2 LED27.2 LED28.2 LED29.2 LED30.2 LED31.2 LED32.2 LED33.2 LED34.2 LED35.2 P4.3 P6.4 P8.2 P_DBG.3 Q1.2 Q2.2 Q3.2 Q4.2 R4.1 R5.1 R6.1 R8.1 R10.1 R12.1 R15.1 R17.1 R23.1 R31.1 R35.1 R36.1 R37.1 R49.2 S1.2 S2.2 U1.3 U1.11 U2.1 U3.4 U3.16 U3.31 U3.47 U4.11 U6.33 U7.4 USB1.5 X2.2 X2.4 | length 4752.2
  Top Layer w10: J12.0@2100,1535 2175,1535 2265,1445 2265,1279.83 2381.32,1163.5 C31.2@2385,1163.5 2385,1120 2437.8,1067.2 S1.2@2605,1067.2 ; v1(2325,2540) v1(2540,2540)
  Bottom Layer w8: 60,620 60,645 ; 120,625 120,650 ; 160,1001.18 USB1.5@207.09,1001.18 ; 170,619.59 170,650 ; 235,620 235,645 ; 281.17,620 281.17,645 ; 345,620 345,645 ; 395,620 395,645 ; 460.59,620 460.59,649.41 ; 573.73,620 573.73,646.27 ; 635,610 635,641.02 ; 715,620 715,645 ; 795,620 795,645 ; 875,620 875,645 ; 955,620 955,645 ; 1010,645 1035,620 ; 1015,695 1050,695 ; 1015,775 1050,775 ; 1015,855 1040,855 ; 1015,935 1040,935 ; 1015,1015 1040,1015 ; 1015,1095 1040,1095 ; 1015,1175 1040,1175 ; 1015,1255 1040,1255 ; 1015,1335 1040,1335 ; 1087.45,1360 1087.45,1387.45 ; 1200.59,1360 1200.59,1389.41 ; 1313.73,1360 1313.73,1386.27 ; 1401,1360 1401,1379 ; 1449,1360 1449,1389 ; 1530,1360 1530,1390 ; 1599.32,1360 1599.32,1389.32 ; 1653.14,1360 1653.14,1386.86 ; 1749.64,1360 1749.64,1380.36 ; 1835.01,1360 1835.01,1395.01 ; 1917.05,1360 1917.05,1390 ; 1992.55,1360 1992.55,1387.45 ; 2030.18,1360 2030.18,1389.82 ; 2105.69,1360 2105.69,1384.31 ; 2143.32,1360 2143.32,1383.32 ; 2210,1360 2210,1390 ; 2256.46,1360 2256.46,1383.54 ; 2331.96,1360 2331.96,1388.04 ; 2390,1360 2390,1390 ; 2460,1360 2460,1390 ; 2530,1360 2530,1380 ; 2610,1360 2610,1390 ; 2671.37,1360 2671.37,1388.63 ; 2740,1360 2740,1380 ; 2822.14,1360 2822.14,1377.86 ; 2880,1360 2880,1380
  Bottom Layer w10: R23.1@297.6,3805.91 Q1.2@297.6,3883.74 ; U1.3@569.29,820 U1.11@650,820 ; X2.4@619.25,3934.37 630.75,3945.87 C37.2@630.75,3994.37 630.75,4126.26 R31.1@627.01,4130 ; C36.2@673.62,3785 673.62,3824.61 X2.2@689.37,3840.35 ; C5.2@705,1268.5 R8.1@785,1268.5 ; C28.2@770,1873.5 C27.2@840,1873.5 ; U3.4@984,1991.42 1033.58,1991.42 ; U3.31@1332.95,2301 1332.95,2337.95 1391.5,2396.5 C16.2@1391.5,2405 C15.2@1391.5,2480 ; U3.47@1426,1952.05 1487.95,1952.05 1513.5,1926.5 1615,1926.5 ; U4.11@1812.01,1625 1812.01,1621.81 1931.69,1621.81 C30.2@1955,1598.5 2036.5,1598.5 J12.0@2100,1535 ; R15.1@2501.5,2066.32 R15.1@2501.5,2070 C23.2@2598.5,2070 2598.5,2486.5 2501.83,2583.17 R12.1@2501.83,2620 C20.2@2598.5,2620 ; R17.1@2501.83,1496.32 R17.1@2501.83,1500 C26.2@2598.5,1500 ; R10.1@2501.83,3182.73 2504.56,3180 C9.2@2597.01,3180
  other v1: 50,1405 130,1405 1900,1420 1975,1420 2050,1420 2140,1420 586,1434 652,1434 714,1434 970,1435 1520,1440 1605,1440 1690,1440 219,1445 1940,1470 2010,1470 2090,1470 615,1482 552,1483 673,1485 895,1500 970,1500 1565,1500 1650,1500 1900,1520 1970,1520 525,1535 591,1538 650,1538 895,1555 1605,1555 1685,1555 2065,1640 2210,1680 2205,1750 2355,1765 2155,1795 44,1856 2350,1880 2205,2015 2280,2015 2350,2015 1940,2150 2285,2200 2345,2255 1940,2260 2285,2290 2345,2365 1677,2429 1768,2536 2800,2580 2890,2580 2650,2755 1092,3020 2650,3090 2640,3295 530,3305 2330,3375 2630,3565 1286,3691 544,3750 545,3809 2355,3820 2450,3820 2545,3820 2645,3820 1266,3834 1474,3864 446,3871 2405,3880 2490,3880 2590,3880 2685,3880 501,3901 1441,3915 446,3923 501,3956 446,3978 501,4014 890,4030 930,4030 970,4030 890,4070 930,4070 970,4070 890,4110 930,4110 970,4110 150,4420 275,4420 390,4420 495,4420 590,4420 685,4420 775,4420 935,4420 1020,4420 1100,4420 1175,4420 1250,4420 1325,4420 1400,4420 1475,4420 1550,4420 1625,4420 1700,4420 1775,4420 1850,4420 1925,4420 2000,4420 2075,4420 2150,4420 2225,4420 2300,4420 2375,4420 2450,4420 2525,4420 2600,4420 2675,4420 2750,4420 2825,4420
GPIO0: J17.1 R24.1 U3.1 U6.15 | length 4064.8
  Top Layer w8: v1(735,3565) 735,3595 790,3650 v1(1240,3650) ; v1(925,2450) 995,2380 995,2225 1085,2135 v1(1085,2015) ; v1(1620,3810) 1690,3880 v1(1720,3880) 1925,3880 J17.1@1940,3895
  Bottom Layer w8: v1(735,3565) 735,3355 795,3295 795,2715 925,2585 v1(925,2450) ; U6.15@1034.33,4016.73 1073.27,4016.73 1090,4000 1160,4000 1180,3980 1560,3980 1660,3880 v1(1720,3880) ; v1(1240,3650) 1460,3650 v1(1620,3810) ; J17.1@1940,3895 2011.5,3823.5 R24.1@2011.5,3815
  Bottom Layer w10: U3.1@984,1932.36 1042.36,1932.36 1085,1975 v1(1085,2015)
GPIO2: P8.1 R29.1 U6.14 | length 1161.8
  Bottom Layer w8: U6.14@1034.33,4036.42 1083.58,4036.42 1100,4020 1180,4020 1200,4000 1280,4000 1300,4020 1420,4020 1440,4000 1660,4000 1935,3725 P8.1@1945,3725 1945,3638.5 R29.1@1958.5,3625
GPIO4: U6.9
GPIO5: R30.2 U6.24 | length 568.4
  Top Layer w8: v1(1000,3600) 1000,3550 1050,3500 R30.2@1078.5,3500
  Bottom Layer w8: U6.24@861.1,3961.61 861.1,3828.9 1000,3690 v1(1000,3600)
GPIO12: U3.28 U6.10 | length 2493.4
  Top Layer w8: v1(1220,4140) 1470,4140 1590,4020 v1(1590,3710)
  Bottom Layer w8: U6.10@1034.33,4115.16 1075.16,4115.16 1100,4140 v1(1220,4140) ; U3.28@1273.9,2301 1273.9,2358.94 1240.31,2392.52 1240.31,2710.31 1450,2920 1450,3500 1590,3640 v1(1590,3710)
GPIO13: U3.27 U6.12 | length 2426.3
  Top Layer w8: v1(1230,4060) 1240.2,4060 1264.2,4084 1476,4084 1555,4005 1555,3675 v1(1545,3665)
  Bottom Layer w8: U6.12@1034.33,4075.79 1104.21,4075.79 1120,4060 v1(1230,4060) ; U3.27@1254.21,2301 1254.21,2350.79 1220.63,2384.37 1220.63,2730.63 1420,2930 1420,3515 1545,3640 v1(1545,3665)
GPIO14: U3.29 U6.16 | length 2395.2
  Bottom Layer w8: U6.16@1034.33,3997.05 1062.95,3997.05 1080,3980 1150,3980 1170,3960 1530,3960 1650,3840 1650,3640 1474.37,3464.37 1474.37,2914.37 1260,2700 1260,2400.68 1293.58,2367.1 U3.29@1293.58,2301
GPIO15: R49.1 U6.13 | length 885.4
  Top Layer w8: R49.1@1436.5,3695 1470,3695 1525,3750 1525,3975 v1(1450,4050)
  Bottom Layer w8: U6.13@1034.33,4056.1 1093.9,4056.1 1110,4040 1200,4040 1220,4020 1270,4020 1300,4050 v1(1450,4050)
GPIO16: J20.1 U6.8 | length 1644.5
  Top Layer w8: J20.1@160,3795 308,3647 567,3647 800,3880 1120,3880 1180,3940 1180,4170 v1(1170,4180)
  Bottom Layer w8: U6.8@998.9,4169.29 998.9,4178.9 1020,4200 1150,4200 v1(1170,4180)
HOLD: U6.18 U7.7 | length 272.6
  Bottom Layer w8: U6.18@979.21,3961.61 979.21,3930.79 1095,3815 U7.7@1173,3815
I_SET: J2.0 R3.2 U1.2 | length 286.8
  Bottom Layer w8: J2.0@390,840 390,898.5 R3.2@400,908.5 508.19,800.31 U1.2@569.29,800.31
I_SET2: J6.2 U1.7 | length 333.3
  Bottom Layer w8: J6.2@656,1031 656,989 699,946 750,946 794,902 794,854 779.68,839.68 U1.7@730.71,839.68
LED_BAT_FULL: R42.2 U3.39 | length 2054.4
  Top Layer w8: R42.2@563.5,3490 563.5,3356.5 580,3340 580,2620 685,2515 990,2515 1045,2460 1045,2255 v1(1145,2155)
  Bottom Layer w8: v1(1145,2155) 1160,2140 1290,2140 1320.47,2109.53 U3.39@1426,2109.53
LED_BAT_LOW: R44.2 U3.40 | length 1834.4
  Top Layer w8: v1(780,3420) 780,3456.5 R44.2@813.5,3490 ; v1(995,2440) 1020,2415 1020,2235 v1(1150,2105)
  Bottom Layer w8: v1(780,3420) 780,3365 830,3315 830,2715 995,2550 v1(995,2440) ; v1(1150,2105) 1292.47,2105 1307.63,2089.84 U3.40@1426,2089.84
LED_CTRL_1: R32.1 U3.54 | length 1371.9
  Top Layer w8: v1(720,2665) 720,2645 745,2620 1030,2620 1270,2380 v1(1270,2050)
  Bottom Layer w8: R32.1@645,2798.5 645,2740 v1(720,2665) ; U3.54@1254.21,1859 1254.21,2034.21 v1(1270,2050)
LED_CTRL_2: R33.1 U3.53 | length 1061.6
  Top Layer w8: v1(1160,2615) 1160,2550 1310,2400 1310,2020 v1(1300,2010)
  Bottom Layer w8: v1(1160,2615) R33.1@1160,2843.5 ; U3.53@1273.9,1859 1273.9,1983.9 v1(1300,2010)